# Altium PCB PCB675.PcbDoc
Units mil, origin at the board's own origin, x right, y up, seen from the top; angles counter-clockwise.
Board outline 1811.02 x 2090 mil, 2 copper layers (Top Layer, Bottom Layer); 41 components, 30 nets, 117 pads, 25 vias.
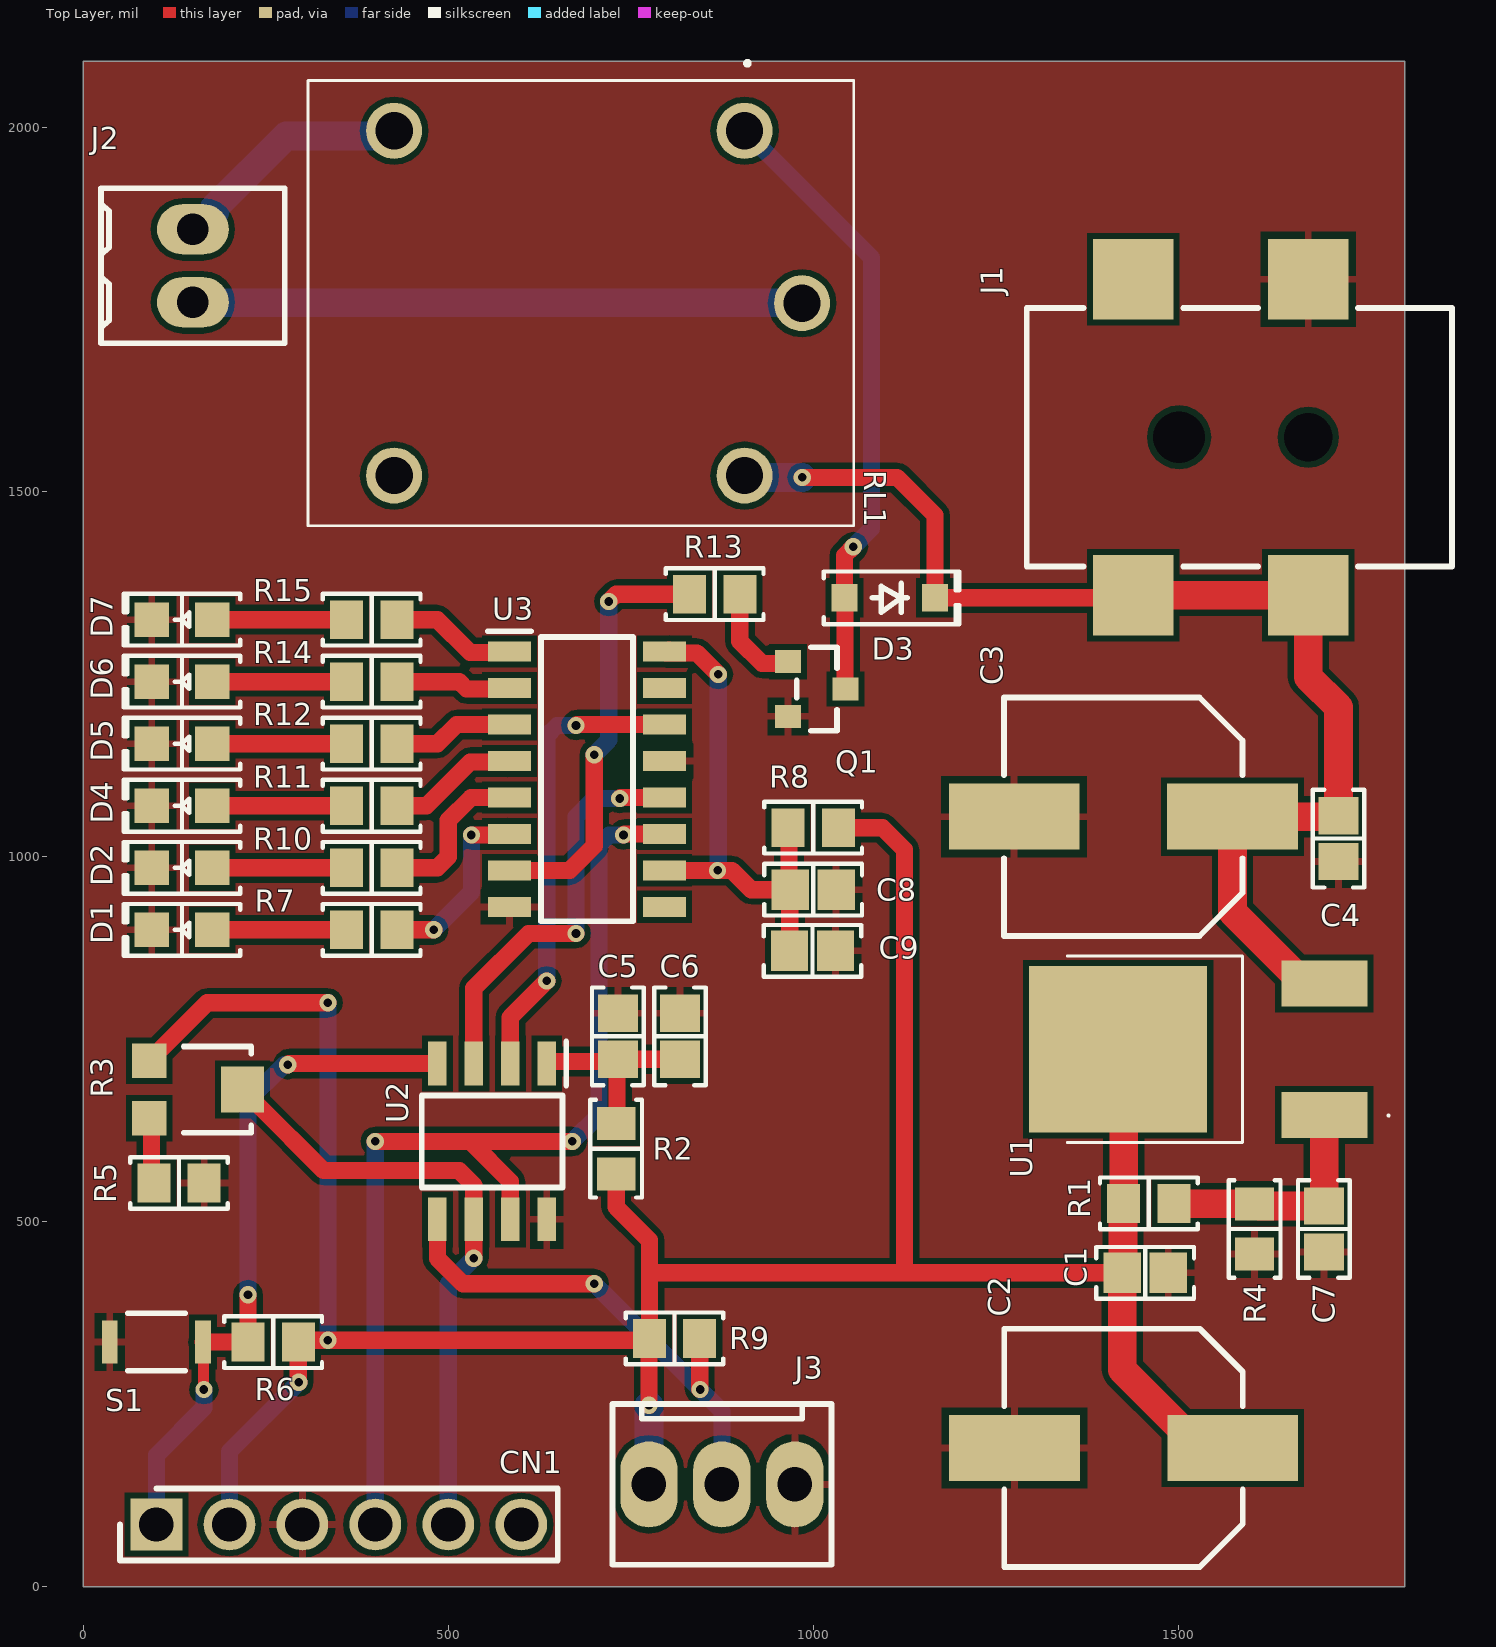
[diagram p0: Top Layer view]
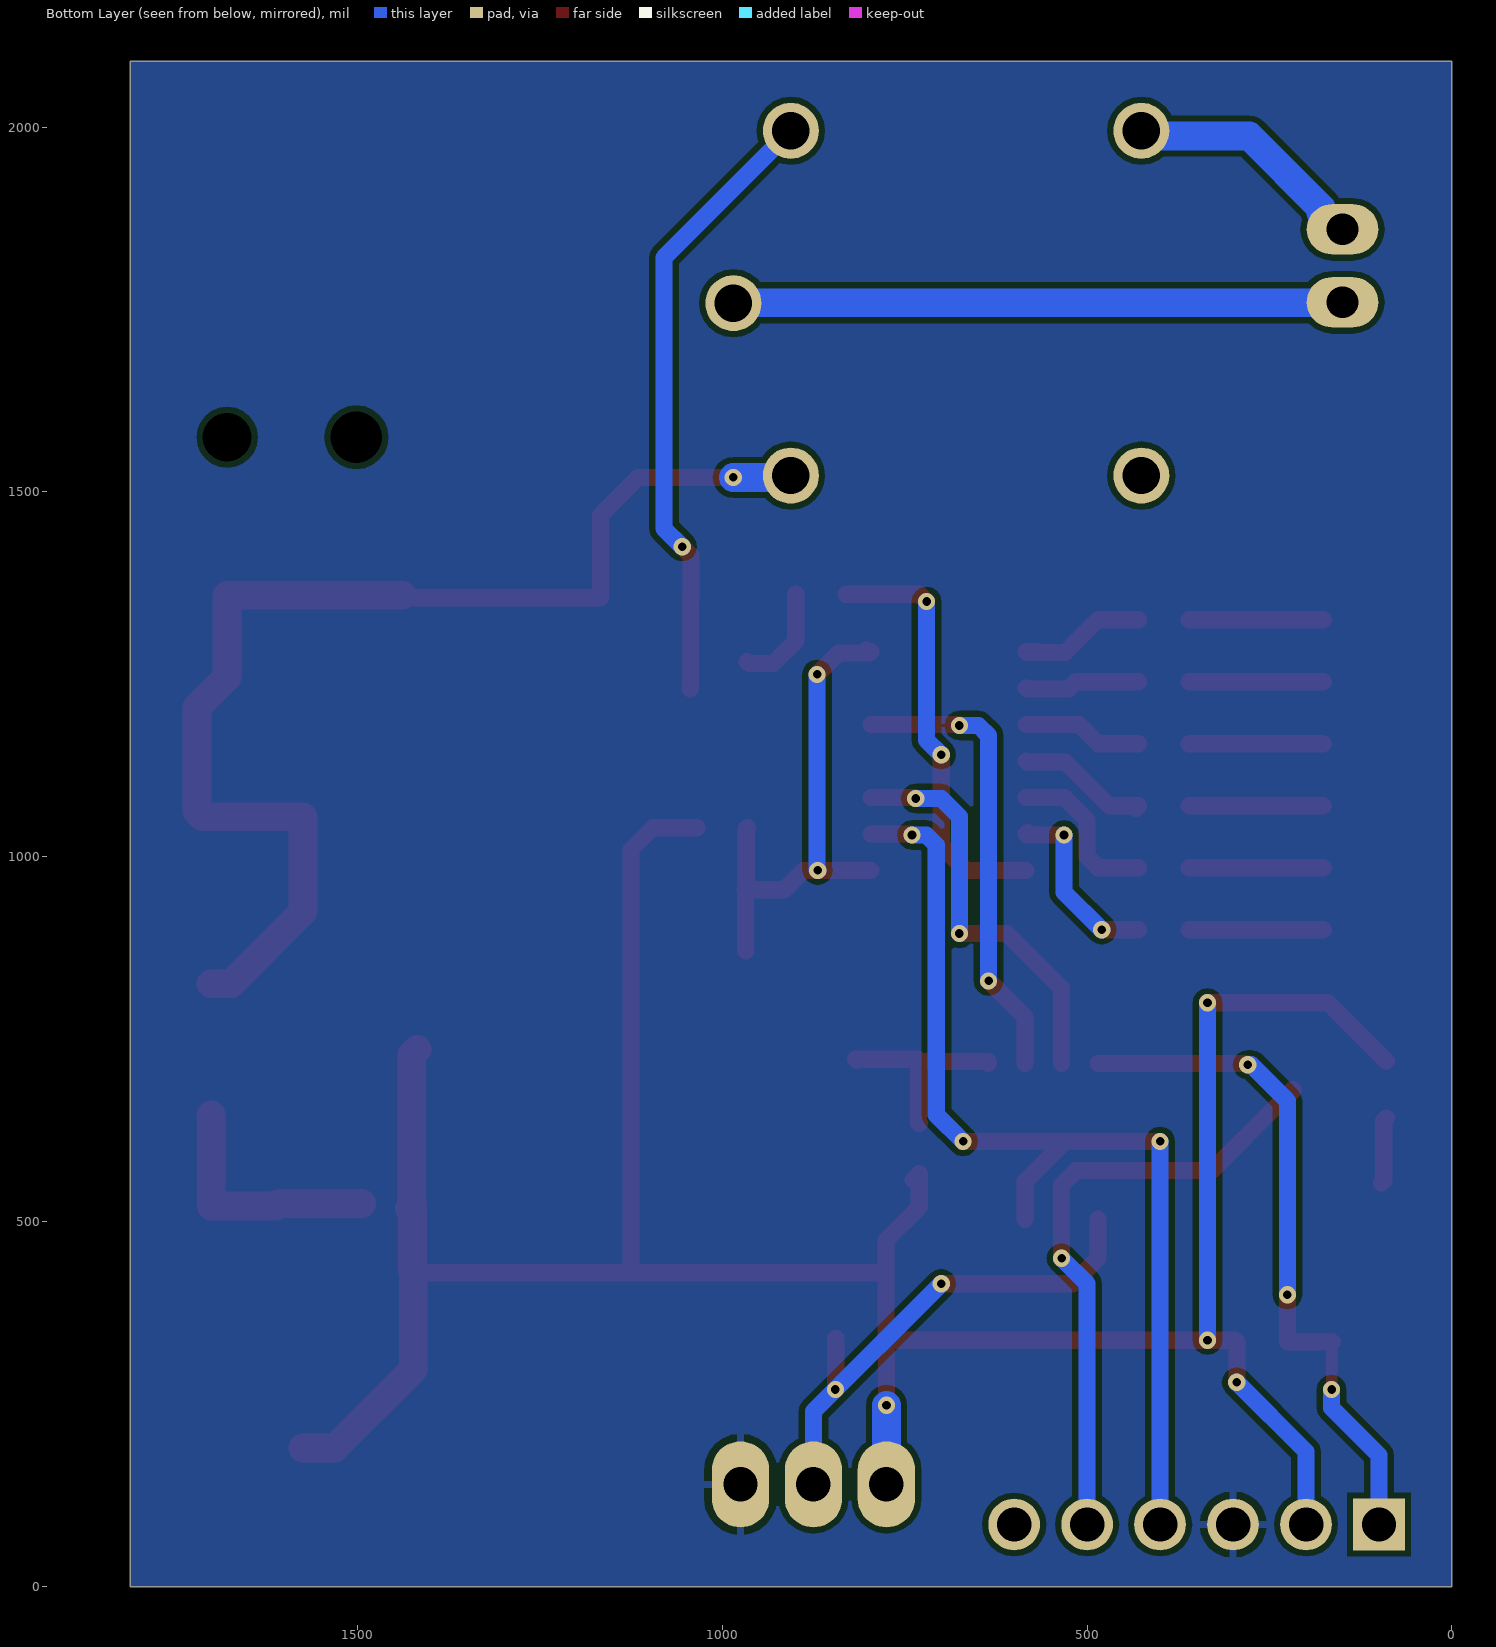
[diagram p1: Bottom Layer view, seen from below]
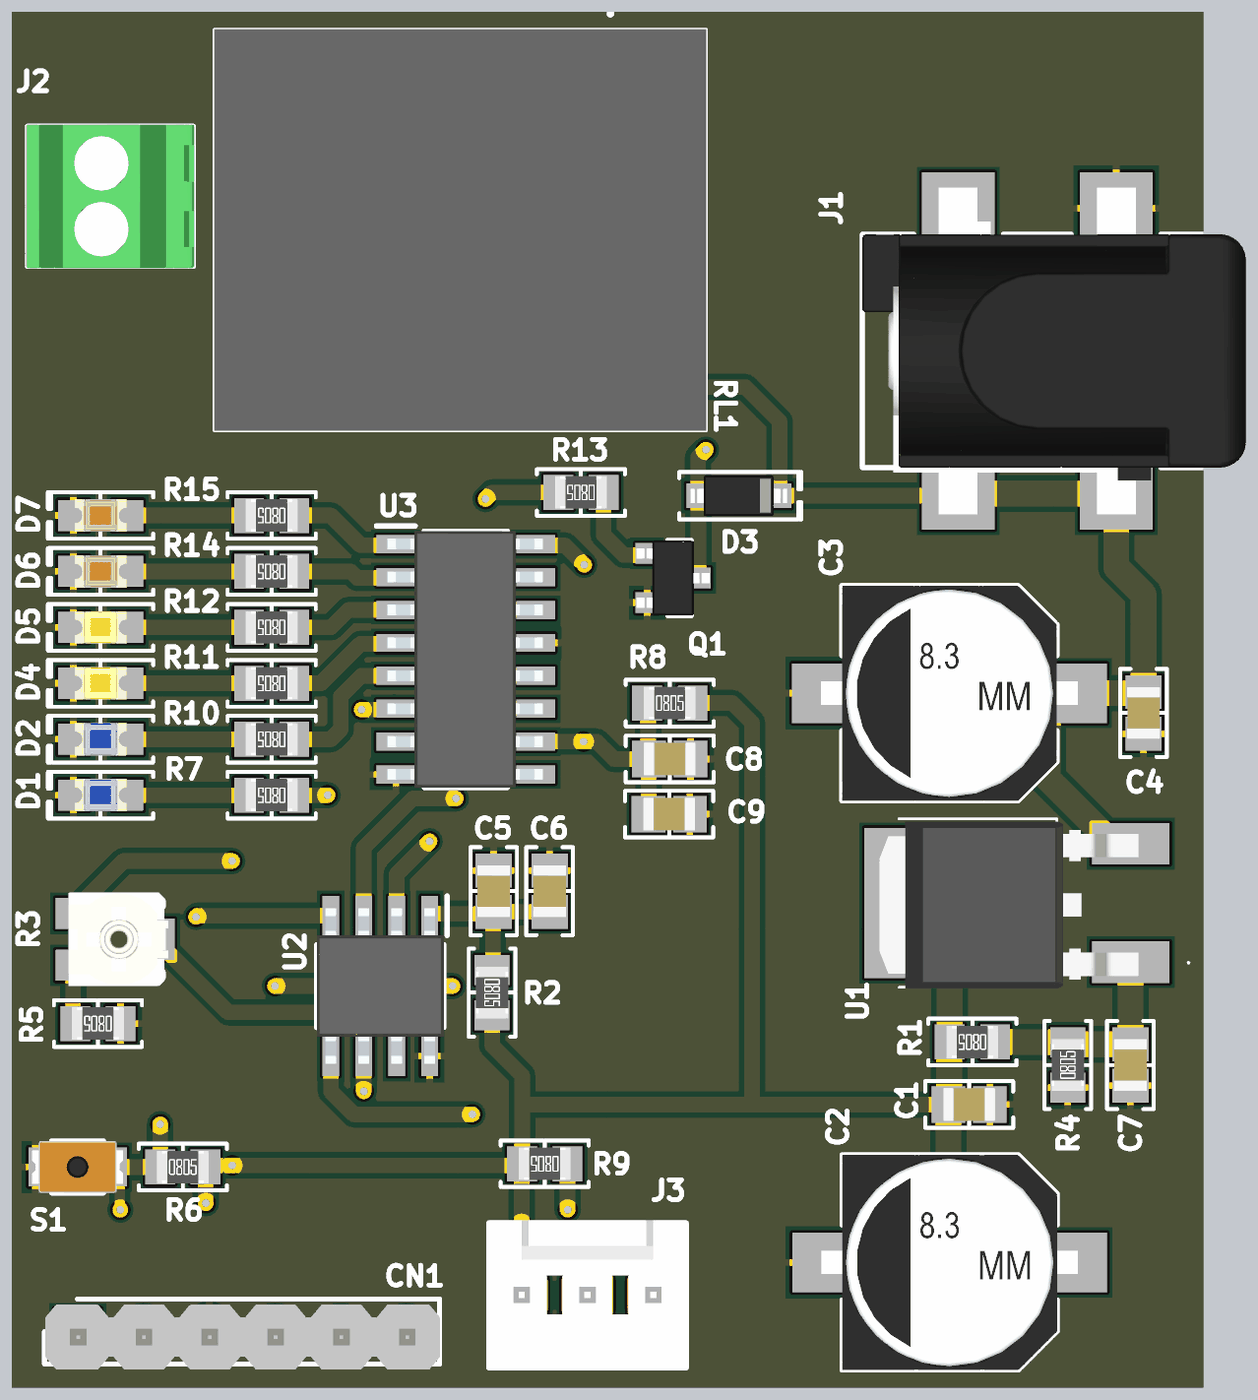
[diagram p2: 3D render of the assembled board from above, using the file's embedded part models]

## Layer stack, top to bottom
Top Solder: solder mask 0.4, Solder Resist, Dk 3.5
Top Layer: signal copper 1.4
Dielectric 1: dielectric 12.6, FR-4, Dk 4.8
Bottom Layer: signal copper 1.4
Bottom Solder: solder mask 0.4, Solder Resist, Dk 3.5

## Board outline
0,0 0,2090 1811.02,2090 1811.02,0

## Design rules (kind name [scope] priority, off if disabled: settings)
Clearance [All] p1: gap=8 ignorepadtopadclearanceinfootprint=FALSE
HoleToHoleClearance [All] p1: gap=5.91 allowstackedmicrovias=TRUE
MinimumSolderMaskSliver [All] p1: minsoldermaskwidth=2
PolygonConnect [All] p1: connectstyle=Relief reliefconductorwidth=10 reliefentries=4 polygonreliefangle="90 Angle" airgapwidth=10
RoutingVias [All] p1: holewidth=11.81 width=23.62 viastyle="Through Hole" minholewidth=7.87 minwidth=15.75 maxholewidth=15.75 maxwidth=31.5
SilkToSilkClearance [All] p1: silktosilkclearance=2
SilkToSolderMaskClearance [IsPad] p1: minsilkscreentomaskgap=2 clearancetoexposedcopper=TRUE
SolderMaskExpansion [All] p1: expansion=4 istentingtop=FALSE
Width [All] p1: maxlimit=39.37 minlimit=15.75 preferedwidth=23.62 minimp=50.000000 maximp=50.000000 favimp=50.000000
26 further rules are at their usual default settings.

## Components (designator, comment, footprint, x,y, rotation, side; value= is the part's Value field where it differs from the comment)
C1 "100nF" "CAP 0805_2012" 1455,430 r180 top
C2 "100µF" "CAP ALSMD 8.3MM H10.5MM" 1425.39,190 r180 top
C3 "100µF" "CAP ALSMD 8.3MM H10.5MM" 1425,1055 r180 top
C4 "100nF" "CAP 0805_2012" 1720,1025 r90 top
C5 "100nF" "CAP 0805_2012" 732.44,754.09 r270 top
C6 "4,7uF" "CAP 0805_2012" 817.44,754.09 r270 top
C7 "100nF" "CAP 0805_2012" 1700,490 r90 top
C8 "4,7uF" "CAP 0805_2012" 1000,955 r180 top
C9 "100nF" "CAP 0805_2012" 999.09,871.17 r180 top
CN1 "KK 6vias" KK6 350,85 r0 top
D1 "Blue" "LED 0805_2012 BLUE" 135,900 r180 top
D2 "Blue" "LED 0805_2012 BLUE" 135,985 r180 top
D3 "1N4148W-TP" SOD-123 1105,1355 r0 top
D4 "Yellow" "LED 0805_2012 YELLOW" 135,1070 r180 top
D5 "Yellow" "LED 0805_2012 YELLOW" 135,1155 r180 top
D6 "Red" "LED 0805_2012 RED" 135,1240 r180 top
D7 "Red" "LED 0805_2012 RED" 135,1325 r180 top
J1 "PJ-002BH-SMT-TR" "CUI PJ-002BH-SMT-TR" 1590,1575 r180 top
J2 "282834-2" "TE 282834-2" 150,1810 r90 top
J3 "0022272031" "MOLEX KK 0022272031" 875,140 r180 top
Q1 "BC817-16Q-7-F" "DIODES SOT-23-3" 1005,1230 r0 top
R1 "1 kOhms" "RES 0805_2012" 1460,525 r180 top
R2 "0r Ohms" "RES 0805_2012" 730,600 r270 top
R3 "10 kOhms" "POT BOURNS TRIMPOT TC33" 161,681 r270 top
R4 "3 kOhms" "RES 0805_2012" 1605,490 r90 top
R5 "560r Ohms" "RES 0805_2012" 131,553 r180 top
R6 "10K" "RES 0805_2012" 260,335 r0 top
R7 "1 kOhms" "RES 0805_2012" 395,900 r180 top
R8 "0r Ohms" "RES 0805_2012" 1000,1040 r0 top
R9 "4K7" "RES 0805_2012" 810,340 r180 top
R10 "1 kOhms" "RES 0805_2012" 395,985 r180 top
R11 "1 kOhms" "RES 0805_2012" 395,1070 r180 top
R12 "1 kOhms" "RES 0805_2012" 395,1155 r180 top
R13 "1 kOhms" "RES 0805_2012" 865,1360 r180 top
R14 "1 kOhms" "RES 0805_2012" 395,1240 r180 top
R15 "1 kOhms" "RES 0805_2012" 395,1325 r180 top
RL1 "Relé 12v 5p" "Relé SPDTPW" 670,1770 r180 top
S1 "KXT341 LHS" "C&K KXT3" 100,335 r180 top
U1 "LM317" TO252-3 1559.29,736.23 r0 top
U2 "PIC12F675" SOIC8 560,610 r270 top
U3 "SN74HC595DT" SOIC16 690,1106.44 r0 top

## Footprints (in the part's own frame and the unit in brackets; to place one, negate y for a bottom-side part, rotate by r counter-clockwise, add the part's x,y. Pads: shape width x height; smd on the part's side, far side on the other; paste and mask are expansions set on the pad)
"C&K KXT3" [mm]
  rect 0.55x1.5 smd: 1(-1.625,0) 2(1.625,0)
  silkscreen extent -1,-1 1,1, body extent -1.75,-1 1.75,1, height 0.58
"CAP 0805_2012" [mm] "Chip Capacitor, 2-Leads, Body 2.00x1.20mm, IPC Medium Density"
  rect 1.3x1.4 smd: 1(-0.8,0) 2(0.8,0)
  silkscreen extent -1.7,-0.9 1.7,0.9, body extent -1,-0.64 1,0.64, height 1.26
"CAP ALSMD 8.3MM H10.5MM" [mm] "Aluminum Electrolytic Capacitor, Body 8.30x8.30x10.50mm, IPC Low Density"
  rect 4.55x2.3 smd: 1(-3.8,0) 2(3.8,0)
  silkscreen extent -4.15,-4.15 4.15,4.15, body extent -4.95,-4.15 4.95,4.15, height 10.5
"CUI PJ-002BH-SMT-TR" [mm]
  rect 2.8x2.8 smd: 1(-2.25,5.5) 1(3.85,5.5) 2(-2.25,-5.5) 3(3.85,-5.5)
  round 0 hole 1.7 unplated: M(-2.25,0)
  round 0 hole 1.8 unplated: M(2.25,0)
  silkscreen extent -7.25,-4.5 7.55,4.5, body extent -7.25,-6.3 7.55,6.3, height 11.4
"DIODES SOT-23-3" [mm] "SOT23, 3-Leads, Body 2.90x2.40mm, Pitch 0.95mm, IPC Medium Density"
  rect 0.9x0.8 smd: 1(-1,0.95) 2(-1,-0.95) 3(1,0)
  silkscreen extent -0.7,-1.45 0.7,1.45, body extent -1.41,-1.45 1.41,1.45, height 1.5
KK6 [mm]
  rect 1.8x1.8 / inner round 1.8 / far side rect 1.8x1.8 hole 1.2: 1(-6.35,0)
  round 1.8 hole 1.2: 2(-3.81,0) 3(-1.27,0) 4(1.27,0) 5(3.81,0) 6(6.35,0)
  silkscreen extent -7.62,-1.25 7.62,1.25, body extent -7.59,-1.47 7.65,1.04, height 8.84
"LED 0805_2012 BLUE" [mm] "Chip Diode, 2-Leads, Body 2.00x1.25mm, IPC Medium Density"
  rect 1.2x1.2 smd: 1(-1.05,0) 2(1.05,0)
  silkscreen extent -2.03,-0.9 2.03,0.9, body extent -1,-0.62 1,0.63, height 0.9
"LED 0805_2012 RED" [mm] "Chip Diode, 2-Leads, Body 2.00x1.25mm, IPC Medium Density"
  rect 1.2x1.2 smd: 1(-1.05,0) 2(1.05,0)
  silkscreen extent -2.03,-0.9 2.03,0.9, body extent -1,-0.62 1,0.63, height 0.9
"LED 0805_2012 YELLOW" [mm] "Chip Diode, 2-Leads, Body 2.00x1.25mm, IPC Medium Density"
  rect 1.2x1.2 smd: 1(-1.05,0) 2(1.05,0)
  silkscreen extent -2.03,-0.9 2.03,0.9, body extent -1,-0.62 1,0.63, height 0.9
"MOLEX KK 0022272031" [mm]
  oval 2x3 hole 1.2: 1(-2.54,0) 2(0,0) 3(2.54,0)
  silkscreen extent -3.81,-2.79 3.81,2.79, body extent -3.81,-2.9 3.81,2.9, height 11.7
"POT BOURNS TRIMPOT TC33" [mm] "Bourns Trimpot TC33X-1 - Open Frame 3mm x 3.8mm x 1.2mm"
  rect 1.2x1.2 smd: 1(-1,-1.8) 3(1,-1.8)
  rect 1.6x1.5 smd: 2(0,1.45)
  silkscreen extent -1.5,-0.6 1.5,1.75, body extent -1.8,-1.91 1.8,1.95, height 1.15
"Relé SPDTPW" [mm] "5 pins 12v"
  round 1.95 hole 1.3: 1(-5.994,-5.715) 2(6.206,-5.715) 3(6.206,6.285) 4(-5.994,6.285) 5(-7.994,0.285)
  silkscreen extent -9.79,-8.12 9.21,8.04, body extent -9.79,-7.46 9.21,8.04, height 15.1
"RES 0805_2012" [mm] "Chip Resistor, 2-Leads, Body 2.00x1.25mm, IPC Medium Density"
  rect 1.15x1.35 smd: 1(-0.875,0) 2(0.875,0)
  silkscreen extent -1.7,-0.9 1.7,0.9, body extent -1,-0.62 1,0.63, height 0.6
SOD-123 [mm] "SOD, 2-Leads, Body 1.55x3.70mm, IPC Medium Density"
  rect 0.9x0.95 smd: 1(-1.575,0) 2(1.575,0)
  silkscreen extent -2.3,-0.92 2.41,0.92, body extent -1.86,-0.78 1.86,0.77, height 1.35
SOIC8 [mm]
  rect 1.525x0.65 smd: 1(-2.712,1.905) 2(-2.712,0.635) 3(-2.712,-0.635) 4(-2.712,-1.905) 5(2.712,-1.905) 6(2.712,-0.635) 7(2.712,0.635) 8(2.712,1.905)
  silkscreen extent -3.47,-2.45 1.6,2.58, body extent -3,-2.45 3,2.45, height 1.75
SOIC16 [mm]
  rect 1.5x0.7 smd: 1(-2.7,4.445) 2(-2.7,3.175) 3(-2.7,1.905) 4(-2.7,0.635) 5(-2.7,-0.635) 6(-2.7,-1.905) 7(-2.7,-3.175) 8(-2.7,-4.445) 9(2.7,-4.445) 10(2.7,-3.175) 11(2.7,-1.905) 12(2.7,-0.635) 13(2.7,0.635) 14(2.7,1.905) 15(2.7,3.175) 16(2.7,4.445)
  silkscreen extent -3.45,-4.95 1.6,5.15, body extent -3.03,-4.95 2.97,4.95, height 1.26
"TE 282834-2" [mm]
  oval 1.75x2.5 hole 1.1: 1(-1.27,0) 2(1.27,0)
  silkscreen extent -2.7,-3.2 2.7,3.2, body extent -2.77,-3.25 2.77,3.25, height 10
TO252-3 [mm]
  rect 3x1.6 smd: 1(3.59,-2.285) 3(3.59,2.285)
  rect 6.2x5.8 smd: 2(-3.59,0)
  silkscreen extent -5.36,-3.25 5.86,3.25, body extent -6.12,-3.3 3.88,3.15, height 2.4

## Part data
C1 C4 C5 C7 C9: library part 08052A101JAT2A, "CAP CER 100PF 200V C0G/NP0 0805", Device Package="0805 (2012 Metric)", Manufacturer="AVX Corporation", Operating Temperature="-55°C ~ 125°C", Supplier Part Number 1=478-1272-1-ND, Temperature Coefficient="C0G, NP0", Tolerance=±5%, Voltage - Rated=200V, Applications="General Purpose", Capacitance=100nF, ComponentLink1Description=Datasheet, ComponentLink1URL=http://datasheets.avx.com/C0GNP0-Dielectric.pdf, ComponentLink2Description="DigiKey Link", ComponentLink2URL=http://digikey.com/product-detail/en/avx-corporation/08052A101JAT2A/478-1272-1-ND/564304, lastupdated="02/09/2020 01:04:41", Lifecycle Status=Active, Minimum Order=1, Mounting Type="Surface Mount, MLCC", Package / Case="0805 (2012 Metric)", Packaging=TapeAndReel, Part Number=08052A101JAT2A, Part Status=Active, partid=3022, price=0.10, Series=-, Size / Dimension="0.079\" L x 0.049\" W (2.01mm x 1.25mm)", Supplier 1=DigiKey, Thickness (Max)="0.037\" (0.94mm)"
C2 C3: library part 100SEV22M8X10.5, "CAP ALUM 22UF 20% 100V SMD", Device Package="Radial, Can - SMD", Lifetime @ Temp.="2000 Hrs @ 85°C", Manufacturer=Rubycon, Operating Temperature="-40°C ~ 85°C", Ratings=AEC-Q200, Ripple Current @ High Frequency="195 mA @ 10 kHz", Ripple Current @ Low Frequency="130 mA @ 120 Hz", Supplier Part Number 1=1189-2383-1-ND, Tolerance=±20%, Voltage - Rated="100 V", Applications=Automotive, Capacitance=100µF, ComponentLink1Description=Datasheet, ComponentLink1URL=http://www.rubycon.co.jp/en/catalog/e_pdfs/aluminum/e_sev.pdf, ComponentLink2Description="DigiKey Link", ComponentLink2URL=https://www.digikey.com/en/products/detail/rubycon/100SEV22M8X10-5/3568696, Height - Seated (Max)="0.413\" (10.50mm)", lastupdated="19/09/2022 14:00:28", Lifecycle Status=Active, Minimum Order=1, Mounting Type="Surface Mount", Package / Case="Radial, Can - SMD", Packaging=TapeAndReel, Part Number=100SEV22M8X10.5, Part Status=Active, partid=7766, Polarization=Polar, price=0.33, Series=SEV, Size / Dimension="0.315\" Dia (8.00mm)", Supplier 1=DigiKey, Surface Mount Land Size="0.327\" L x 0.327\" W (8.30mm x 8.30mm)"
C6 C8: library part 08052A101JAT2A, "CAP CER 100PF 200V C0G/NP0 0805", Capacitance=100nF, Device Package="0805 (2012 Metric)", Manufacturer="AVX Corporation", Operating Temperature="-55°C ~ 125°C", Supplier Part Number 1=478-1272-1-ND, Temperature Coefficient="C0G, NP0", Tolerance=±5%, Voltage - Rated=200V, Applications="General Purpose", ComponentLink1Description=Datasheet, ComponentLink1URL=http://datasheets.avx.com/C0GNP0-Dielectric.pdf, ComponentLink2Description="DigiKey Link", ComponentLink2URL=http://digikey.com/product-detail/en/avx-corporation/08052A101JAT2A/478-1272-1-ND/564304, lastupdated="02/09/2020 01:04:41", Lifecycle Status=Active, Minimum Order=1, Mounting Type="Surface Mount, MLCC", Package / Case="0805 (2012 Metric)", Packaging=TapeAndReel, Part Number=08052A101JAT2A, Part Status=Active, partid=3022, price=0.10, Series=-, Size / Dimension="0.079\" L x 0.049\" W (2.01mm x 1.25mm)", Supplier 1=DigiKey, Thickness (Max)="0.037\" (0.94mm)"
D1 D2: library part B1701NB--20D000114U1930, "2.0(L)X1.3(W)X0.8(H) MM", Current - Test=20mA, Device Package="0805 (2012 Metric)", Manufacturer="Harvatek Corporation", Millicandela Rating=71.5mcd, Supplier Device Package=0805, Supplier Part Number 1=3147-B1701NB--20D000114U1930CT-ND, Voltage - Forward (Vf) (Typ)=3.3V, Color=Blue, ComponentLink1Description=Datasheet, ComponentLink1URL=https://media.digikey.com/pdf/Data%20Sheets/Harvatek%20PDFs/B1701NB--20D000114U1930.pdf, ComponentLink2Description="DigiKey Link", ComponentLink2URL=https://www.digikey.com/en/products/detail/harvatek-corporation/B1701NB-20D000114U1930/16671748, Height (Max)=0.90mm, lastupdated="19/09/2022 13:49:33", Lens Size="1.40mm x 1.30mm", Lens Style="Rectangle with Flat Top", Lens Transparency=Diffused, Lifecycle Status=Active, Minimum Order=1, Mounting Type="Surface Mount", Package / Case="0805 (2012 Metric)", Packaging=TapeAndReel, Part Number=B1701NB--20D000114U1930, Part Status=Active, partid=1161, price=0.09, Series=B1701NB, Size / Dimension="2.00mm L x 1.30mm W", Supplier 1=DigiKey, Viewing Angle=130°, Wavelength - Dominant=470nm, Wavelength - Peak=468nm
D3: "DIODE GEN PURP 100V 150MA SOD123", Capacitance @ Vr, F="2pF @ 0V, 1MHz", Current - Average Rectified (Io)=150mA, Current - Reverse Leakage @ Vr="1 µA @ 75 V", Manufacturer="Micro Commercial Co", Operating Temperature - Junction="-65°C ~ 150°C", Package / Case=SOD-123, Supplier Part Number 1=1N4148WTPMSCT-ND, Voltage - DC Reverse (Vr) (Max)="100 V", Voltage - Forward (Vf) (Max) @ If="1.25 V @ 150 mA", ComponentLink1Description=Datasheet, ComponentLink1URL=https://www.mccsemi.com/pdf/Products/1N4148W(SOD123).pdf, ComponentLink2Description="DigiKey Link", ComponentLink2URL=https://www.digikey.com/en/products/detail/micro-commercial-co/1N4148W-TP/717196, Diode Type=Standard, lastupdated="19/09/2022 13:46:25", Lifecycle Status=Active, Minimum Order=1, Mounting Type="Surface Mount", Packaging=TapeAndReel, Part Number=1N4148W-TP, Part Status=Active, partid=999, price=0.02, Reverse Recovery Time (trr)="4 ns", Series=-, Speed="Small Signal =< 200mA (Io), Any Speed", Supplier 1=DigiKey, Supplier Device Package=SOD-123
D4 D5: library part 5975411407F, "LED YELLOW DIFFUSED 2SMD", Current - Test=20mA, Device Package="0805 (2012 Metric)", Lens Color=White, Manufacturer=Dialight, Millicandela Rating=11.7mcd, Supplier Device Package=2-SMD, Supplier Part Number 1=350-2953-1-ND, Voltage - Forward (Vf) (Typ)=2.1V, Color=Yellow, ComponentLink1Description=Datasheet, ComponentLink1URL=http://www.dialightsignalsandcomponents.com/Assets/Brochures_And_Catalogs/Indication/597-3xxx-4xx.pdf, ComponentLink2Description="DigiKey Link", ComponentLink2URL=https://www.digikey.com/en/products/detail/dialight/5975411407F/2432601, Configuration=Standard, Height (Max)=0.79mm, lastupdated="19/09/2022 13:51:13", Lens Size="1.19mm x 1.24mm", Lens Style="Rectangle with Flat Top", Lens Transparency=Diffused, Lifecycle Status=Active, Minimum Order=1, Mounting Type="Surface Mount", Package / Case="0805 (2012 Metric)", Packaging=TapeAndReel, Part Number=5975411407F, Part Status=Active, partid=55, price=0.24, Series=597, Size / Dimension="2.00mm L x 1.25mm W", Supplier 1=DigiKey, Viewing Angle=150°, Wavelength - Dominant=572nm, Wavelength - Peak=570nm
D6 D7: library part VFHV1112H-3BZ2B-TR, "LED", Current - Test=20mA, Device Package="0805 (2012 Metric)", Lens Color=White, Manufacturer="Stanley Electric Co", Millicandela Rating=110mcd, Supplier Part Number 1=404-1314-1-ND, Voltage - Forward (Vf) (Typ)=1.9V, Color=Red, ComponentLink1Description=Datasheet, ComponentLink1URL=http://www.stanley-components.com/php/downloaddatafile.php?rp=0,VFHV1112H-3BZ2B-TR_e.pdf, ComponentLink2Description="DigiKey Link", ComponentLink2URL=http://digikey.com/product-detail/en/stanley-electric-co/VFHV1112H-3BZ2B-TR/404-1314-1-ND/9477319, Configuration=Standard, Height (Max)=0.90mm, lastupdated="19/09/2022 13:50:32", Lens Size="1.30mm x 1.25mm", Lens Style="Rectangle with Flat Top", Lifecycle Status=Active, Minimum Order=1, Mounting Type="Surface Mount", Package / Case="0805 (2012 Metric)", Packaging=TapeAndReel, Part Number=VFHV1112H-3BZ2B-TR, Part Status=Active, partid=359, price=0.08, Series=-, Size / Dimension="2.00mm L x 1.25mm W", Supplier 1=DigiKey, Viewing Angle=140°, Wavelength - Dominant=615nm, Wavelength - Peak=624nm
J1: "CONN PWR JACK 2.5X5.5MM SOLDER", Current Rating (Amps)=5A, Manufacturer="CUI Devices", Material Flammability Rating="UL94 V-0", Supplier Part Number 1=CP-002BHPJCT-ND, Voltage - Rated=24VDC, Actual Diameter="0.098\" (2.50mm ID), 0.256\" (6.50mm OD)", ComponentLink1Description=Datasheet, ComponentLink1URL=https://www.cuidevices.com/product/resource/digikeypdf/pj-002bh-smt-tr.pdf, ComponentLink2Description="DigiKey Link", ComponentLink2URL=http://digikey.com/product-detail/en/cui-devices/PJ-002BH-SMT-TR/CP-002BHPJCT-ND/669694, Connector Type=Jack, Features="Board Guide, Solder Retention", Gender=Male, Industry Recognized Mating Diameter="2.50mm ID (0.098\"), 5.50mm OD (0.217\")", Internal Switch(s)="Single Switch, Normally Closed", lastupdated="26/05/2020 13:34:08", Lifecycle Status=Active, Mating Length/Depth="0.350\" (8.90mm)", Minimum Order=1, Mounting Type="Surface Mount, Right Angle", Number of Positions/Contacts="2 Conductors, 3 Contacts", Packaging=TapeAndReel, Part Number=PJ-002BH-SMT-TR, Part Status=Active, price=0.90, Series=-, Shielding=Unshielded, Supplier 1=DigiKey, Termination=Solder
J2: "TERM BLK 2P SIDE ENT 2.54MM PCB", Color=Green, Current=10A, Manufacturer="TE Connectivity AMP Connectors", Supplier Part Number 1=A98333-ND, Voltage=150V, ComponentLink1Description=Datasheet, ComponentLink1URL=https://www.te.com/commerce/DocumentDelivery/DDEController?Action=srchrtrv&DocNm=282834&DocType=Customer+Drawing&DocLang=English, ComponentLink2Description="DigiKey Link", ComponentLink2URL=http://digikey.com/product-detail/en/te-connectivity-amp-connectors/282834-2/A98333-ND/1150135, lastupdated="15/01/2020 04:15:38", Lifecycle Status=Active, Mating Orientation="Horizontal with Board", Minimum Order=1, Mounting Type="Through Hole", Number of Levels=1, Packaging=Bulk, Part Number=282834-2, Part Status=Active, Pitch="0.100\" (2.54mm)", Positions Per Level=2, price=0.88, Series=Buchanan, Supplier 1=DigiKey, Wire Gauge="16-30 AWG", Wire Termination="Screw - Rising Cage Clamp"
J3: "CONN HEADER VERT 3POS 2.54MM", Insulation Color=Natural, Manufacturer=Molex, Material Flammability Rating="UL94 V-0", Supplier Part Number 1=WM4112-ND, ComponentLink1Description=Datasheet, ComponentLink1URL=https://www.molex.com/pdm_docs/sd/022272031_sd.pdf, ComponentLink2Description="DigiKey Link", ComponentLink2URL=http://digikey.com/product-detail/en/molex/0022272031/WM4112-ND/1130578, Connector Type=Header, Contact Finish - Mating=Tin, Contact Finish - Post=Tin, Contact Finish Thickness - Mating="100.0µin (2.54µm)", Contact Length - Mating="0.295\" (7.49mm)", Contact Length - Post="0.140\" (3.56mm)", Contact Material=Brass, Contact Shape=Square, Contact Type="Male Pin", Fastening Type="Friction Lock", Insulation Height="0.461\" (11.70mm)", Insulation Material="Polyamide (PA), Nylon", lastupdated="12/01/2020 23:51:54", Lifecycle Status=Active, Minimum Order=1, Mounting Type="Through Hole", Number of Positions=3, Number of Positions Loaded=All, Number of Rows=1, Overall Contact Length="0.560\" (14.22mm)", Packaging=Bulk, Part Number=0022272031, Part Status=Active, partid=77, Pitch - Mating="0.100\" (2.54mm)", price=0.37, Series="KK 6410", Shrouding="Shrouded - 1 Wall", Style="Board to Cable/Wire", Supplier 1=DigiKey, Termination=Solder
Q1: "TRANS NPN 45V 0.5A SOT23-3", Current - Collector (Ic) (Max)="500 mA", Current - Collector Cutoff (Max)=100nA, DC Current Gain (hFE) (Min) @ Ic, Vce="100 @ 100mA, 1V", Frequency - Transition=100MHz, Manufacturer="Diodes Incorporated", Operating Temperature="-65°C ~ 150°C (TJ)", Package / Case="TO-236-3, SC-59, SOT-23-3", Power - Max="310 mW", Supplier Device Package=SOT-23-3, Supplier Part Number 1=BC817-16Q-7-FDICT-ND, Voltage - Collector Emitter Breakdown (Max)="45 V", ComponentLink1Description=Datasheet, ComponentLink1URL=https://www.diodes.com/assets/Datasheets/BC817-16Q_40Q.pdf, ComponentLink2Description="DigiKey Link", ComponentLink2URL=https://www.digikey.com/en/products/detail/diodes-incorporated/BC817-16Q-7-F/6187213, lastupdated="19/09/2022 14:06:44", Lifecycle Status=Active, Minimum Order=1, Mounting Type="Surface Mount", Packaging=TapeAndReel, Part Number=BC817-16Q-7-F, Part Status=Active, partid=88, price=0.03, Series="Automotive, AEC-Q101", Supplier 1=DigiKey, Transistor Type=NPN, Vce Saturation (Max) @ Ib, Ic="700mV @ 50mA, 500mA"
R1 R2 R5 R7 R8 R10 R11 R12 R13 R14 R15: library part RNCS0805BKE1K00, "RES 1K OHM 0.1% 1/10W 0805", Device Package="0805 (2012 Metric)", Manufacturer="Stackpole Electronics Inc", Operating Temperature="-55°C ~ 155°C", Power (Watts)="0.1W, 1/10W", Ratings=AEC-Q200, Supplier Device Package=0805, Supplier Part Number 1=RNCS0805BKE1K00CT-ND, Temperature Coefficient=±25ppm/°C, Tolerance=±0.1%, ComponentLink1Description=Datasheet, ComponentLink1URL=https://www.seielect.com/catalog/sei-rncs_rnch.pdf, ComponentLink2Description="DigiKey Link", ComponentLink2URL=https://www.digikey.com/en/products/detail/stackpole-electronics-inc/RNCS0805BKE1K00/1800073, Composition="Thin Film", Features="Anti-Corrosive, Automotive AEC-Q200, Moisture Resistant", Height - Seated (Max)="0.026\" (0.65mm)", lastupdated="19/09/2022 13:36:59", Lifecycle Status=Active, Minimum Order=1, Number of Terminations=2, Package / Case="0805 (2012 Metric)", Packaging=TapeAndReel, Part Number=RNCS0805BKE1K00, Part Status=Active, partid=27715, price=0.09, Series=RNCS, Size / Dimension="0.079\" L x 0.049\" W (2.00mm x 1.25mm)", Supplier 1=DigiKey
  R1 R7 R10 R11 R12 R13 R14 R15: Resistance="1 kOhms"
  R2 R8: Resistance="0r Ohms"
  R5: Resistance="560r Ohms"
R3: library part TC33X-1-103E, "TRIMMER 10K OHM 0.1W J LEAD TOP", Manufacturer="Bourns Inc.", Power (Watts)="0.1W, 1/10W", Resistive Material=Cermet, Supplier Part Number 1=TC33X-1-103ECT-ND, Temperature Coefficient=±250ppm/°C, Tolerance=±25%, Adjustment Type="Top Adjustment", ComponentLink1Description=Datasheet, ComponentLink1URL=https://www.bourns.com/docs/Product-Datasheets/TC33.pdf, ComponentLink2Description="DigiKey Link", ComponentLink2URL=https://www.digikey.com/en/products/detail/bourns-inc/TC33X-1-103E/2566867, lastupdated="19/09/2022 13:51:26", Lifecycle Status=Active, Minimum Order=1, Mounting Type="Surface Mount", Number of Turns=1, Packaging=TapeAndReel, Part Number=TC33X-1-103E, Part Status=Active, partid=9, price=0.11, Resistance="10 kOhms", Series="Trimpot® TC33 - Open Frame", Size / Dimension="Rectangular - 0.150\" x 0.142\" Face (3.80mm x 3.60mm)", Supplier 1=DigiKey, Termination Style="J Lead"
R4: library part RT0805DRD073KL, "RES SMD 3K OHM 0.5% 1/8W 0805", Device Package="0805 (2012 Metric)", Manufacturer=Yageo, Operating Temperature="-55°C ~ 155°C", Power (Watts)="0.125W, 1/8W", Supplier Device Package=0805, Supplier Part Number 1=311-2744-1-ND, Temperature Coefficient=±25ppm/°C, Tolerance=±0.5%, ComponentLink1Description=Datasheet, ComponentLink1URL=https://www.yageo.com/upload/media/product/productsearch/datasheet/rchip/PYu-RT_1-to-0.01_RoHS_L_11.pdf, ComponentLink2Description="DigiKey Link", ComponentLink2URL=http://digikey.com/product-detail/en/yageo/RT0805DRD073KL/311-2744-1-ND/6129163, Composition="Thin Film", Height - Seated (Max)="0.024\" (0.60mm)", lastupdated="19/09/2022 13:36:59", Lifecycle Status=Active, Minimum Order=1, Number of Terminations=2, Package / Case="0805 (2012 Metric)", Packaging=TapeAndReel, Part Number=RT0805DRD073KL, Part Status=Active, partid=27799, price=0.03, Resistance="3 kOhms", Series=RT, Size / Dimension="0.079\" L x 0.049\" W (2.00mm x 1.25mm)", Supplier 1=DigiKey
R6: library part RNCS0805BKE1K00, "RES 1K OHM 0.1% 1/10W 0805", Device Package="0805 (2012 Metric)", Manufacturer="Stackpole Electronics Inc", Operating Temperature="-55°C ~ 155°C", Power (Watts)="0.1W, 1/10W", Ratings=AEC-Q200, Resistance="10k Ohms", Supplier Device Package=0805, Supplier Part Number 1=RNCS0805BKE1K00CT-ND, Temperature Coefficient=±25ppm/°C, Tolerance=±0.1%, ComponentLink1Description=Datasheet, ComponentLink1URL=https://www.seielect.com/catalog/sei-rncs_rnch.pdf, ComponentLink2Description="DigiKey Link", ComponentLink2URL=https://www.digikey.com/en/products/detail/stackpole-electronics-inc/RNCS0805BKE1K00/1800073, Composition="Thin Film", Features="Anti-Corrosive, Automotive AEC-Q200, Moisture Resistant", Height - Seated (Max)="0.026\" (0.65mm)", lastupdated="19/09/2022 13:36:59", Lifecycle Status=Active, Minimum Order=1, Number of Terminations=2, Package / Case="0805 (2012 Metric)", Packaging=TapeAndReel, Part Number=RNCS0805BKE1K00, Part Status=Active, partid=27715, price=0.09, Series=RNCS, Size / Dimension="0.079\" L x 0.049\" W (2.00mm x 1.25mm)", Supplier 1=DigiKey
R9: library part RNCS0805BKE1K00, "RES 1K OHM 0.1% 1/10W 0805", Device Package="0805 (2012 Metric)", Manufacturer="Stackpole Electronics Inc", Operating Temperature="-55°C ~ 155°C", Power (Watts)="0.1W, 1/10W", Ratings=AEC-Q200, Resistance="4,7k Ohms", Supplier Device Package=0805, Supplier Part Number 1=RNCS0805BKE1K00CT-ND, Temperature Coefficient=±25ppm/°C, Tolerance=±0.1%, ComponentLink1Description=Datasheet, ComponentLink1URL=https://www.seielect.com/catalog/sei-rncs_rnch.pdf, ComponentLink2Description="DigiKey Link", ComponentLink2URL=https://www.digikey.com/en/products/detail/stackpole-electronics-inc/RNCS0805BKE1K00/1800073, Composition="Thin Film", Features="Anti-Corrosive, Automotive AEC-Q200, Moisture Resistant", Height - Seated (Max)="0.026\" (0.65mm)", lastupdated="19/09/2022 13:36:59", Lifecycle Status=Active, Minimum Order=1, Number of Terminations=2, Package / Case="0805 (2012 Metric)", Packaging=TapeAndReel, Part Number=RNCS0805BKE1K00, Part Status=Active, partid=27715, price=0.09, Series=RNCS, Size / Dimension="0.079\" L x 0.049\" W (2.00mm x 1.25mm)", Supplier 1=DigiKey
S1: "SWITCH TACTILE SPST-NO 0.02A 15V", Contact Rating @ Voltage="0.02A @ 15VDC", Manufacturer=C&K, Operating Force=330gf, Operating Temperature="-40°C ~ 85°C", Supplier Part Number 1=CKN10781CT-ND, Actuator Height off PCB, Vertical=0.60mm, Actuator Orientation="Top Actuated", Actuator Type=Standard, Circuit=SPST-NO, ComponentLink1Description=Datasheet, ComponentLink1URL=https://dznh3ojzb2azq.cloudfront.net/products/Tactile/KXT3/documents/datasheet.pdf, ComponentLink2Description="DigiKey Link", ComponentLink2URL=https://www.digikey.com/en/products/detail/c-k/KXT341-LHS/6607322, Illumination=Non-Illuminated, lastupdated="19/09/2022 14:02:57", Lifecycle Status=Active, Minimum Order=1, Mounting Type="Surface Mount", Outline="3.00mm x 2.00mm", Packaging=TapeAndReel, Part Number="KXT341 LHS", Part Status=Active, price=0.13, Series=KXT3, Supplier 1=DigiKey, Switch Function=Off-Mom, Termination Style="SMD (SMT) Tab"

## Via types
v1: diameter 23.62, hole 11.81, Top Layer to Bottom Layer, 25 vias

## Nets (pads, with @x,y where several pads share a name; then routed paths per layer and width w, separated by ;. In a path a pad name is that pad's centre, name@x,y a point inside that pad or via, vN(x,y) a via of type N, cw(c..) or ccw(c..) an arc to the next point about the centre after c; other vN are vias at no path point)
DS: U2.2 U3.14 | length 637.7
  Top Layer w23.62: U2.2 585,780 v1(635,830) ; v1(675,1180) 676.44,1181.44 U3.14
  Bottom Layer w23.62: v1(635,830) 635,1166.16 648.84,1180 v1(675,1180)
GND: C1.1 C2.2 C3.2 C4.1 C5.1 C6.1 C7.1 C8.1 C9.1 CN1.3 D1.2 D2.2 D4.2 D5.2 D6.2 D7.2 J1.2 J3.1 Q1.2 R4.1 R5.1 S1.2 U2.8 U3.8 U3.13
M: CN1.1 R6.1 S1.1 U2.4 | length 950.1
  Top Layer w15.75: S1.1 164.49,334.49 164.49,270.51 v1(165,270)
  Top Layer w23.62: S1.1 R6.1 v1(225.55,400) ; v1(280,715) 281.77,716.77 U2.4
  Bottom Layer w23.62: CN1.1 100,180 165,245 v1(165,270) ; v1(225.55,400) 225.55,665.55 275,715 v1(280,715)
NetC5_2: C5.2 C6.2 R2.1 U2.1 | length 274.6
  Top Layer w23.62: U2.1 635,718.7 635.98,719.69 729.53,719.69 C5.2@731.22,721.38 ; R2.1 731.22,635.67 C5.2@731.22,721.38 ; C6.2 815.96,721.12 814.49,722.6 C5.2 C5.2@731.22,721.38
NetC7_2: C7.2 R1.1 R4.2 U1.1 | length 332
  Top Layer w39.37: R1.1 1494.72,524.72 1604.72,524.72 R4.2 1608.94,524.45 1611.89,521.5 C7.2 1700.31,521.81 1700.31,645.95 U1.1
NetC8_2: C8.2 C9.2 R8.1 U3.10 U3.16 | length 711.7
  Top Layer w23.62: U3.10 v1(869.02,981.44) 888.56,981.44 915,955 C8.2@967.6,955 ; U3.16 798.27,1279.47 840.53,1279.47 v1(870,1250) ; U3.16@800.63,1281.44 U3.16@802.6,1283.41 ; R8.1 967.03,1038.52 967.03,955.57 C8.2@967.6,955 ; C9.2 968.05,871.63 968.05,954.55 C8.2@967.6,955 ; C8.2 C8.2@967.6,955
  Bottom Layer w23.62: v1(869.02,981.44) 870,982.42 v1(870,1250)
NetD1_1: D1.1 R7.2 | length 184.2
  Top Layer w23.62: D1.1 R7.2
NetD2_1: D2.1 R10.2 | length 184.2
  Top Layer w23.62: D2.1 R10.2
NetD3_1: D3.1 Q1.3 RL1.1 | length 853.4
  Top Layer w23.62: Q1.3 1043.68,1230.69 1043.68,1353.31 1042.49,1354.5 D3.1 1042.99,1412.99 v1(1055,1425)
  Bottom Layer w23.62: RL1.1 1080,1821 1080,1450 v1(1055,1425)
NetD4_1: D4.1 R11.2 | length 184.2
  Top Layer w23.62: D4.1 R11.2
NetD5_1: D5.1 R12.2 | length 184.2
  Top Layer w23.62: D5.1 R12.2
NetD6_1: D6.1 R14.2 | length 184.2
  Top Layer w23.62: D6.1 R14.2
NetD7_1: D7.1 R15.2 | length 184.2
  Top Layer w23.62: D7.1 R15.2
NetJ2_1: J2.1 RL1.5 | length 835.2
  Bottom Layer w39.37: J2.1 150.61,1759.39 984.13,1759.39 RL1.5
NetJ2_2: J2.2 RL1.2 | length 335.6
  Bottom Layer w39.37: J2.2 156.77,1860 179.53,1882.75 179.53,1889.53 277.84,1987.84 418.53,1987.84 RL1.2
NetQ1_1: Q1.1 R13.1 | length 144.3
  Top Layer w23.62: R13.1 899.45,1295.55 930,1265 963.23,1265 Q1.1
NetR3_3: R3.3 R5.2 | length 91.3
  Top Layer w23.62: R3.3 93.34,638.42 93.34,556.21 R5.2
OW: J3.2 R9.1 U2.5 | length 700.4
  Top Layer w23.62: U2.5 485,450 520,415 v1(700,415) ; R9.1 844.45,270.55 v1(845,270)
  Bottom Layer w23.62: v1(700,415) 875,240 J3.2
PC: CN1.5 R3.2 U2.6 | length 851.8
  Top Layer w23.62: R3.2 218.09,679.03 235.8,661.31 237.77,661.31 329.09,570 515,570 535,550 v1(535,450)
  Bottom Layer w23.62: CN1.5 500,415 v1(535,450)
PD: CN1.4 U2.7 U3.11 | length 1441.9
  Top Layer w23.62: v1(400,610) 530,610 ; U2.7 585,555 530,610 ; v1(670,610) 530,610 ; v1(740,1030) 741.44,1031.44 U3.11
  Bottom Layer w23.62: CN1.4 v1(400,610) ; v1(670,610) 706.62,646.62 706.62,675 706.62,875 706.62,1016.16 720.46,1030 v1(740,1030)
QB: R15.1 U3.1 | length 189.2
  Top Layer w23.62: R15.1 485,1325 530,1280 582.26,1280 U3.1 U3.1@567.95,1281.44
QC: R14.1 U3.2 | length 159
  Top Layer w23.62: R14.1 515,1240 525,1230 582.26,1230 U3.2
QD: R12.1 U3.3 | length 165.2
  Top Layer w23.62: R12.1 485,1155 511.44,1181.44 U3.3
QE: R11.1 U3.4 | length 184.8
  Top Layer w23.62: R11.1@432.77,1066.68 R11.1 470,1070 530,1130 581.2,1130 581.73,1129.47 U3.4
QF: R10.1 U3.5 | length 223.5
  Top Layer w23.62: R10.1 485,985 500,1000 500,1050 530,1080 531.44,1081.44 U3.5
QG: R7.1 U3.6 | length 257.4
  Top Layer w23.62: R7.1 v1(480,900) ; v1(531.62,1030) 582.26,1030 U3.6 U3.6@581.73,1033.41
  Bottom Layer w23.62: v1(480,900) 531.62,951.62 v1(531.62,1030)
RL: R13.2 U3.7 | length 588.2
  Top Layer w23.62: U3.7 666.44,981.44 700,1015 v1(700,1140) ; v1(720,1350) 730,1360 R13.2
  Bottom Layer w23.62: v1(700,1140) 720,1160 v1(720,1350)
ST: U2.3 U3.12 | length 566.5
  Top Layer w23.62: U2.3 535,820 610,895 v1(675,895) ; v1(735,1080) 736.44,1081.44 U3.12
  Bottom Layer w23.62: v1(675,895) 675,1055 700,1080 v1(735,1080)
VCC: C1.2 C2.1 CN1.2 J3.3 R1.2 R2.2 R3.1 R6.2 R8.2 R9.2 U1.2 | length 3944.7
  Top Layer w23.62: R3.1 169.76,800 v1(335,800) ; v1(295,280) 294.45,280.55 R6.2 296.95,337.5 v1(334.97,337.5) 773.05,337.5 R9.2@775,339.45 ; R2.2@738.26,557.29 R2.2 730,520 775.55,474.45 775.55,430.3 ; v1(775,248.38) R9.2@775,339.45 ; R8.2 1095,1040 1125,1010 1125,434.62 1129.62,430 ; C1.2 1129.62,430 ; R9.2@775,339.45 R9.2 775.55,430.3 ; 775.55,430.3 775.85,430 1129.62,430
  Top Layer w39.37: U1.2 1425.55,728.63 R1.2 1424.53,523.98 1424.53,431.02 C1.2 1423.5,297.2 1530.71,190 C2.1 ; R1.2@1425.55,521.06 R1.2@1428.5,518.11
  Bottom Layer w23.62: CN1.2 200,185 v1(295,280) ; v1(334.97,337.5) v1(335,800)
  Bottom Layer w39.37: J3.3 v1(775,248.38)
VDD: C3.1 C4.2 D3.2 J1.1 RL1.4 U1.3 | length 1668.4
  Top Layer w23.62: v1(985,1520) 1115,1520 1167.01,1467.99 D3.2 1434.96,1355 J1.1@1438.43,1358.46
  Top Layer w39.37: J1.1@1438.43,1358.46 1678.58,1358.46 1678.58,1246.42 1720,1205 1720,1062.4 1712.6,1055 C3.1 1574.61,924.65 1673.07,826.19 U1.3
  Bottom Layer w39.37: RL1.4 908.56,1520 v1(985,1520)
pads on no net: CN1.6 J1.3 J1.M RL1.3 U3.9 U3.15

## Polygon pours and split planes (outlines as drawn)
GND on Top Layer "GND_L01_P002" (solid, pour order 2): 0,0 0,2090 1811.02,2090 1811.02,0
GND on Bottom Layer "GND_L02_P003" (solid, pour order 3): 0,0 0,2090 1811.02,2090 1811.02,0